# Allegro board senior design v4.brd
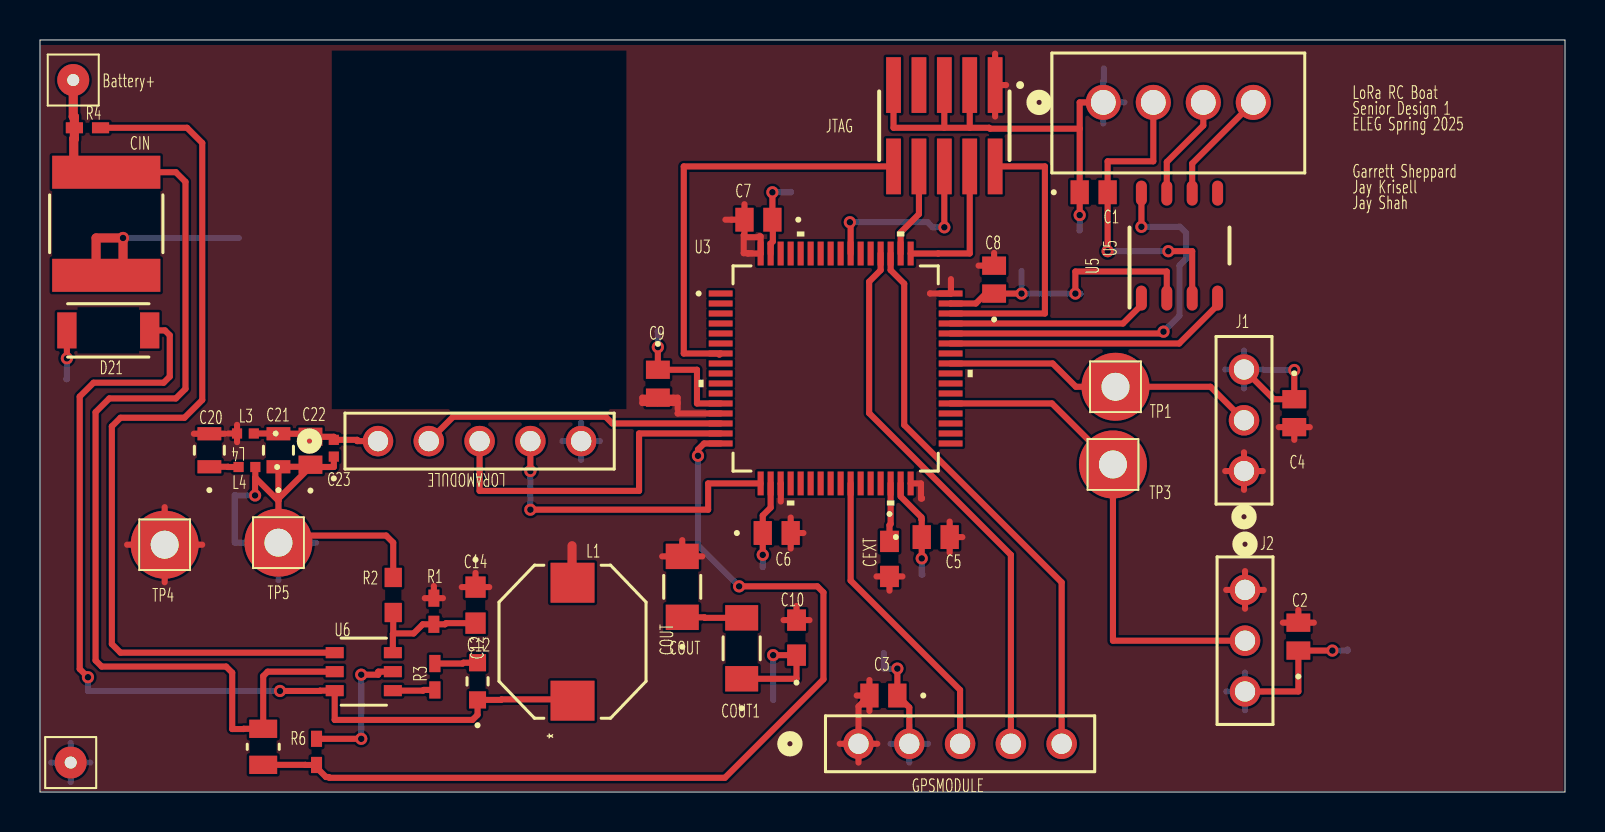
[diagram p0: board, top side]
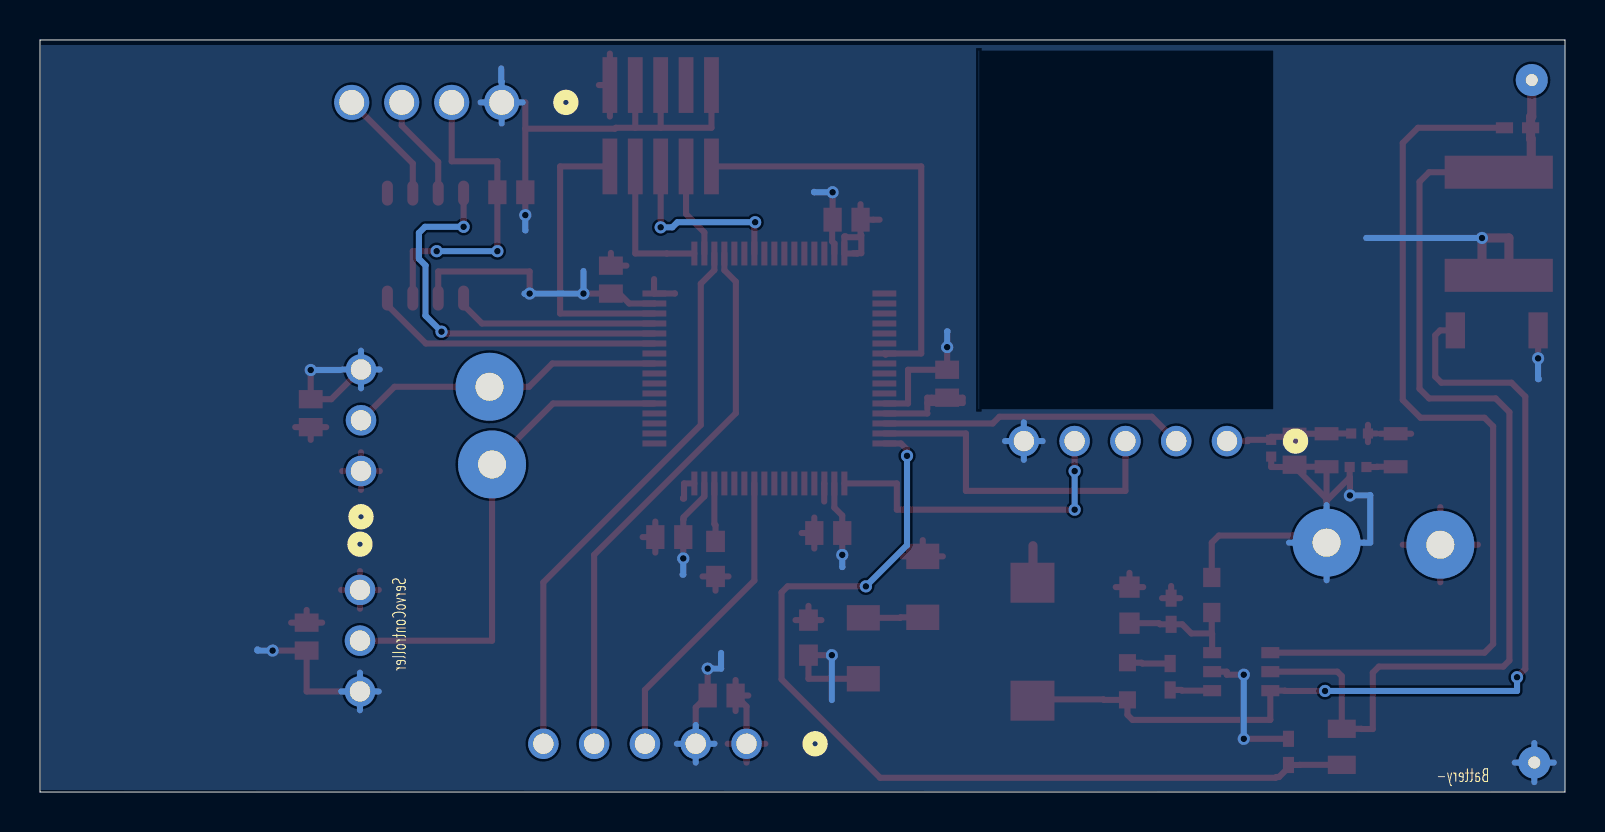
[diagram p1: board, bottom side, seen from below]

Outline 76.26 x 37.61 mm; copper layers: TOP, BOTTOM. Coordinates in mm from the lower left corner of the outline.
Outline path: 0,37.61 0,0 76.26,0 76.26,37.61 0,37.61

## Design rules (mm)
constraint set DEFAULT: min track width 0.305

## Placement (name value [footprint] x y rotation side)
C1  .1uF  [CAP_KGM21_KAV-L]  52.69 30 0 top
C2  .1uF  [CAP_KGM21_KAV-L]  62.93 7.77 90 top
C3  .1uF  [CAP_KGM21_KAV-L]  42.18 4.83 180 top
C4  .1uF  [CAP_KGM21_KAV-L]  62.72 18.95 270 top
C5  .1uF  [CAP_KGM21_KAV-L]  44.79 12.75 0 top
C6  .1uF  [CAP_KGM21_KAV-L]  36.84 12.95 0 top
C7  .1uF  [CAP_KGM21_KAV-L]  35.93 28.63 180 top
C8  .1uF  [CAP_KGM21_KAV-L]  47.71 25.63 90 top
C9  .1uF  [CAP_KGM21_KAV-L]  30.9 20.42 270 top
C10  4.7uF  [CAP_0603_CL10A_1P6XP8_SAM-M]  37.83 7.72 90 top
C12  .1uf  [CAP_CL10_SAM-M]  21.88 5.54 90 top
C14  470pF  [CAP_0603G_AVX-M]  21.78 9.35 270 top
C20  10uF  [G-21_MUR-L]  8.47 17.09 90 top
C21  10uF  [G-21_MUR-L]  11.92 17.09 90 top
C22  .1uF  [CAP_KGM21_KAV-L]  13.52 17.07 90 top
C23  47pF  [CAP_GJM1555C1H220JB01__MUR-L]  14.69 17.2 90 top
CANHEADER  CONN_B4B-XH-A  [CONN_B4B-XH-A_JST]  53.17 34.49 180 top
CEXT  4.7 uF  [CAP_0603_CL10A_1P6XP8_SAM-M]  42.48 11.66 270 top
CIN  10uF  [CAP_NTS_55_2P8T_NIP]  3.31 28.42 90 top
COUT  10uf  [G-31_MUR-M]  32.12 10.26 90 top
COUT1  10uf  [G-31_MUR-M]  35.09 7.19 90 top
D21  DIODE_MFLAT  [M-FLAT_TOS-L]  3.42 23.09 0 top
GND  Battery-  [AMV_CON1]  1.54 1.47 0 top
GPSMODULE  CONN5_1LFBN-RC  [CONN5_1LFBN-RC_SUL]  40.93 2.41 0 top
JTAG  FTSH-105-XX-X-DV  [SAMTEC_FTSH-105-XX-X-DV]  45.22 33.32 180 top
L3  INDUCTOR  [IND_BLM15_0402_MUR-L]  10.27 17.93 180 top
L4  INDUCTOR  [IND_BLM15_0402_MUR-L]  10.35 16.26 180 top
LORAMODULE  CONN5_1LFBN-RC  [CONN5_1LFBN-RC_SUL]  16.9 17.55 0 top
R1  15K  [RC0402N_PAN-M]  19.7 9.04 270 top
R2  4.7K  [RC0603N_YAG-M]  17.66 9.86 90 top
R3  51  [RC0402N_YAG-M]  19.75 5.77 270 top
R4  5.1K  [RC0402N_PAN-M]  2.37 33.22 0 top
R5  30K  [RES_R0805_ROM-M]  11.16 2.26 270 top
R6  10K  [RES_1005_SAM-M]  13.83 2.01 270 top
REF  -  [unnamed]  26.63 7.52 90 top
SPEEDCONTROLLER  CONN_PPTC031  [CONN_PPTC031_SUL]  60.21 16.05 270 top
STEERINGSERVO  CONN_PPTC031  [CONN_PPTC031_SUL]  60.26 10.11 90 top
TP1  TEST POINT  [AMV_TEST_POINT]  53.78 20.27 0 top
TP3  TEST POINT  [AMV_TEST_POINT]  53.66 16.38 0 top
TP4  TEST POINT  [AMV_TEST_POINT]  6.23 12.37 0 top
TP5  TEST POINT  [AMV_TEST_POINT]  11.92 12.47 0 top
U3  STM32F4XXR2  [LQFP64-10X10MM]  39.79 21.18 0 top
U5  TCAN1042H-Q1D  [D0008A_L]  56.98 27.33 90 top
U6  R1240N001x  [SOT-23-6W_PE-SOT23-6W-0512_NMD]  16.19 6.02 0 top
VIN  Battery+  [AMV_CON1]  1.66 35.61 0 top

## Library data of the parts
C1-C10 C14 C20-C23 CEXT COUT COUT1 = C: User Part Number: PN; Tolerance: TOL
C12 = C
CANHEADER = B4B-XH-A: User Part Number: PN; Tolerance: TOL
CIN = KTS500B106M55N0T00: User Part Number: PN; Tolerance: TOL
D21 = CMS06TE12L,Q,M: User Part Number: PN; Tolerance: TOL
GND VIN = CON1
GPSMODULE LORAMODULE = PPTC051LFBN-RC: User Part Number: PN; Tolerance: TOL
JTAG = FTSH-105-XX-X-DV
L3 L4 = INDUCTOR: User Part Number: PN; Tolerance: TOL
R1-R6 = R: User Part Number: PN; Tolerance: TOL
REF = -: User Part Number: PN; Tolerance: TOL
SPEEDCONTROLLER STEERINGSERVO = PPTC031LFBN-RC: User Part Number: PN; Tolerance: TOL
TP1 TP3-TP5 = TEST POINT
U3 = STM32F446RET6TR: User Part Number: PN; Tolerance: TOL
U5 = TCAN1042HDRQ1: Tolerance: TOL; User Part Number: PN
U6 = R1240N001B-TR-FE_3: User Part Number: PN; Tolerance: TOL

## Footprints (pads in the part's own frame, mm; a bottom-side part is the same pattern mirrored in y, then rotated)
AMV_CON1
  round 1.6 hole 0.6: 1(0,0)
AMV_TEST_POINT
  round 3.4 hole 1.4: 1(0,0)
CAP_0603_CL10A_1P6XP8_SAM-M
  rect 1.067x0.94 smd: 1(-0.876,0) 2(0.876,0)
CAP_0603G_AVX-M
  rect 1.067x1.016 smd: 1(-0.902,0) 2(0.902,0)
CAP_CL10_SAM-M
  rect 0.859x0.851 smd: 1(-0.929,0) 2(0.929,0)
CAP_GJM1555C1H220JB01__MUR-L
  rect 0.508x0.508 smd: 1(-0.419,0) 2(0.419,0)
CAP_KGM21_KAV-L
  rect 0.914x1.194 smd: 1(-0.699,0) 2(0.699,0)
CAP_NTS_55_2P8T_NIP
  rect 1.651x5.41 smd: 1(-2.578,0) 2(2.578,0)
CONN5_1LFBN-RC_SUL
  round 1.524 hole 1.016: 1(0,0) 2(2.54,0) 3(5.08,0) 4(7.62,0) 5(10.16,0)
CONN_B4B-XH-A_JST
  round 1.753 hole 1.245: 1(0,0) 2(-2.5,0) 3(-5,0) 4(-7.5,0)
CONN_PPTC031_SUL
  round 1.524 hole 1.016: 1(0,0) 2(-2.54,0) 3(-5.08,0)
D0008A_L
  oval 1.25x0.55 smd: 1(-2.625,1.905) 2(-2.625,0.635) 3(-2.625,-0.635) 4(-2.625,-1.905) 5(2.625,-1.905) 6(2.625,-0.635) 7(2.625,0.635) 8(2.625,1.905)
G-21_MUR-L
  rect 0.66x1.194 smd: 1(-0.826,0) 2(0.826,0)
G-31_MUR-M
  rect 1.27x1.651 smd: 1(-1.524,0) 2(1.524,0)
IND_BLM15_0402_MUR-L
  rect 0.508x0.508 smd: 1(-0.419,0) 2(0.419,0)
LQFP64-10X10MM
  rect 1.194x0.305 smd: 1(-5.75,3.75) 2(-5.75,3.25) 3(-5.75,2.75) 4(-5.75,2.25) 5(-5.75,1.75) 6(-5.75,1.25) 7(-5.75,0.75) 8(-5.75,0.25) 9(-5.75,-0.25) 10(-5.75,-0.75) 11(-5.75,-1.25) 12(-5.75,-1.75) 13(-5.75,-2.25) 14(-5.75,-2.75) 15(-5.75,-3.25) 16(-5.75,-3.75) 33(5.75,-3.75) 34(5.75,-3.25) 35(5.75,-2.75) 36(5.75,-2.25) 37(5.75,-1.75) 38(5.75,-1.25) 39(5.75,-0.75) 40(5.75,-0.25) 41(5.75,0.25) 42(5.75,0.75) 43(5.75,1.25) 44(5.75,1.75) 45(5.75,2.25) 46(5.75,2.75) 47(5.75,3.25) 48(5.75,3.75)
  rect 0.305x1.194 smd: 17(-3.75,-5.75) 18(-3.25,-5.75) 19(-2.75,-5.75) 20(-2.25,-5.75) 21(-1.75,-5.75) 22(-1.25,-5.75) 23(-0.75,-5.75) 24(-0.25,-5.75) 25(0.25,-5.75) 26(0.75,-5.75) 27(1.25,-5.75) 28(1.75,-5.75) 29(2.25,-5.75) 30(2.75,-5.75) 31(3.25,-5.75) 32(3.75,-5.75) 49(3.75,5.75) 50(3.25,5.75) 51(2.75,5.75) 52(2.25,5.75) 53(1.75,5.75) 54(1.25,5.75) 55(0.75,5.75) 56(0.25,5.75) 57(-0.25,5.75) 58(-0.75,5.75) 59(-1.25,5.75) 60(-1.75,5.75) 61(-2.25,5.75) 62(-2.75,5.75) 63(-3.25,5.75) 64(-3.75,5.75)
M-FLAT_TOS-L
  rect 0.965x1.803 smd: 1(-2.07,0) 2(2.07,0)
RC0402N_PAN-M
  rect 0.859x0.551 smd: 1(-0.654,0) 2(0.654,0)
RC0402N_YAG-M
  rect 0.864x0.559 smd: 1(-0.66,0) 2(0.66,0)
RC0603N_YAG-M
  rect 0.965x0.864 smd: 1(-0.876,0) 2(0.876,0)
RES_1005_SAM-M
  rect 0.809x0.551 smd: 1(-0.654,0) 2(0.654,0)
RES_R0805_ROM-M
  rect 0.914x1.397 smd: 1(-0.902,0) 2(0.902,0)
SAMTEC_FTSH-105-XX-X-DV
  rect 0.74x2.79 smd: 01(-2.54,-2.035) 02(-2.54,2.035) 03(-1.27,-2.035) 04(-1.27,2.035) 05(0,-2.035) 06(0,2.035) 07(1.27,-2.035) 08(1.27,2.035) 09(2.54,-2.035) 10(2.54,2.035)
SOT-23-6W_PE-SOT23-6W-0512_NMD
  rect 0.902x0.559 smd: 1(-1.454,0.95) 2(-1.454,0) 3(-1.454,-0.95) 4(1.454,-0.95) 5(1.454,0) 6(1.454,0.95)
unnamed
  rect 2x2.2 smd: (-2.95,0) (2.95,0)

## Nets
3.3V: C2.2 C3.2 C4.2 C5.2 C6.2 C7.2 C8.2 C9.2 C10.2 C14.1 C20.2 CEXT.2 COUT.2 GPSMODULE.1 JTAG.01 L3.2 R1.1 SPEEDCONTROLLER.1 STEERINGSERVO.1 TP4.1 U3.13 U3.19 U3.32 U3.48 U3.64
GND: CIN.1
VBAT: U3.1
0: C1.1 C2.1 C3.1 C4.1 C5.1 C6.1 C7.1 C8.1 C9.1 C10.1 C21.1 C22.1 C23.1 CANHEADER.1 COUT1.1 D21.1 GND.1 GPSMODULE.2 JTAG.03 JTAG.05 JTAG.09 L4.1 LORAMODULE.5 R2.2 R6.1 SPEEDCONTROLLER.3 STEERINGSERVO.3 TP5.1 U3.12 U3.18 U3.31 U3.47 U3.63 U5.2 U6.5
ADC: R5.2 R6.2 U3.16
PA13 TMS: JTAG.02 U3.46
PA14 TCLK: JTAG.04 U3.49
PA15 TDI: JTAG.08 U3.50
PB3 TBO: JTAG.06 U3.55
RESET: JTAG.10 U3.7
N04277: GPSMODULE.3 U3.26
N04281: GPSMODULE.4 U3.52
N04285: GPSMODULE.5 U3.51
N04355: SPEEDCONTROLLER.2 TP1.1 U3.41
N04395: STEERINGSERVO.2 TP3.1 U3.37
N04429: C21.2 C22.2 C23.2 L3.1 LORAMODULE.1
N04477: LORAMODULE.2 U3.14
N04485: LORAMODULE.3 U3.15
N04755: U3.44 U5.8
N04759: U3.43 U5.4
N04763: U3.45 U5.1
N04855: CANHEADER.4 U5.6
N17576: C14.2 R1.2 R2.1 U6.6
N17942: R3.2 U6.4
N18028: C12.1 D21.2 U6.3
N24517: LORAMODULE.4 U3.17
N24691: CANHEADER.3 U5.7
N24886: C1.2 CANHEADER.2 U5.3(VCC)
N27410: C20.1 L4.2
N27791: CEXT.1 U3.30
N061071: C12.2 R3.1
N068040: COUT.1 COUT1.2
N088060: CIN.2 R4.1 R5.1 U6.2(VIN) VIN.1
N148600: R4.2 U6.1

Pads without a net: JTAG 07; U3 2 3 4 5 6 8 9 10 11 20 21 22 23 24 25 27 28 29 33 34 35 36 38 39 40 42 53 54 56 57 58 59 60 61 62; U5 5

## Via types
v1: diameter 0.61, hole 0.33, TOP to BOTTOM, 28 vias

## Routing (per net, layer and track width the routed paths; a pad name or vN(x,y) marks a point on that pad's centre or on a via; arc(x,y) is an arc through that point)
3.3V: length 69.1
  TOP w0.305: C7.2 34.28,28.63 ; C7.2 35.23,29.4 ; C7.2 35.23,27.85 35.19,27.85 35.19,26.95 35.39,26.95 ; C10.2 37.83,9.31 ; C10.2 37.18,8.6 ; C10.2 38.48,8.6 ; 31.89,19.46 31.89,19.72 C9.2 ; 31.89,19.46 30.9,19.46 ; 31.89,19.46 31.89,19.15 ; U3.19 37.04,15.43 37.04,14.53 ; C20.2 9.25,17.92 ; C20.2 7.69,17.92 ; C20.2 8.47,17.93 ; STEERINGSERVO.1 61.2,10.11 ; STEERINGSERVO.1 60.26,9.17 ; STEERINGSERVO.1 60.26,11.05 ; STEERINGSERVO.1 59.32,10.11 ; C2.2 62.93,9.11 ; C2.2 63.7,8.47 ; C2.2 62.15,8.47 ; COUT.2 32.12,12.6 ; COUT.2 33.12,11.79 ; COUT.2 31.11,11.79 ; C9.2 30.9,19.46 ; C9.2 30.12,19.72 30.12,19.46 30.9,19.46 ; JTAG.01 48.31,35.36 ; JTAG.01 47.76,36.93 ; JTAG.01 47.76,33.79 ; 40.93,1.47 GPSMODULE.1 ; GPSMODULE.1 40.93,4.28 C3.2 ; GPSMODULE.1 39.99,2.41 ; GPSMODULE.1 41.87,2.41 ; 60.21,15.11 SPEEDCONTROLLER.1 ; SPEEDCONTROLLER.1 59.27,16.05 ; SPEEDCONTROLLER.1 61.15,16.05 ; SPEEDCONTROLLER.1 60.21,16.99 ; C3.2 41.48,5.6 ; C3.2 40.84,4.83 ; C3.2 41.48,4.05 ; 19.24,9.7 R1.1 ; R1.1 19.7,10.3 ; R1.1 20.15,9.7 ; 44.51,24.94 44.51,24.93 U3.48 45.55,24.93 45.55,25.65 ; 42.48,10.07 CEXT.2 ; CEXT.2 43.13,10.78 ; CEXT.2 41.83,10.78 ; C4.2 63.5,18.25 ; C4.2 62.72,17.61 ; C4.2 61.95,18.25 ; U3.13 31.89,18.93 31.89,18.95 ; C8.2 47.71,26.96 ; C8.2 46.94,26.33 ; C8.2 47.85,26.33 ; C6.2 38.18,12.95 ; C6.2 37.54,13.73 ; C6.2 37.54,12.18 ; 45.49,11.98 C5.2 ; C5.2 45.62,12.62 ; C5.2 45.49,13.53 ; C5.2 46.13,12.75 ; 9.42,17.93 L3.2 ; L3.2 9.85,18.36 ; L3.2 9.85,17.5 ; 21.09,10.25 C14.1 ; C14.1 21.78,10.96 ; C14.1 22.47,10.25 ; 4.36,12.37 TP4.1 ; TP4.1 6.23,14.25 ; TP4.1 8.11,12.37 ; TP4.1 6.23,10.49 ; 35.39,26.95 35.39,26.93 U3.64 36.04,27.79 35.97,27.79 35.97,27.75 35.23,27.75 ; 35.39,26.95 35.6,26.95 ; 26.61,12.32 26.63,12.32 ; 44.11,14.71 44.11,14.68 44.06,14.68 44.06,15.43 U3.32
  TOP w0.457: 26.61,10.46 26.61,12.32
0: length 160.7
  TOP w0.305: R2.2 17.66,12.47 17.31,12.83 12.28,12.83 TP5.1 ; SPEEDCONTROLLER.3 61.7,19.65 C4.1 v1(62.72,21.11) ; R6.1 v1(16.06,2.66) ; D21.1 v1(1.35,21.69) ; 51.99,33.18 51.99,34.49 CANHEADER.1 ; 51.99,33.18 47.51,33.18 47.46,33.22 46.49,33.22 ; 51.99,33.18 C1.1 v1(51.99,28.85) ; COUT1.1 37.83,5.66 C10.1 v1(36.66,6.85) ; GPSMODULE.2 43.47,4.23 C3.1 v1(42.87,6.17) ; U3.12 32.85,19.43 32.85,21.12 C9.1 v1(30.9,22.25) ; U3.47 46.8,24.43 47.29,24.93 C8.1 v1(49.08,24.93) ; v1(10.76,14.83) 10.76,15.72 10.77,15.72 ; 10.77,15.72 11.92,14.57 ; 10.77,15.72 L4.1 ; 11.92,14.57 11.92,14.67 ; 11.92,14.57 TP5.1 ; U5.2 56.35,26.03 51.78,26.03 v1(51.78,24.93) ; 45.22,33.22 42.68,33.22 JTAG.09 ; 45.22,33.22 JTAG.05 ; 45.22,33.22 46.49,33.22 ; 11.92,14.67 13.52,16.27 ; 11.92,14.67 C21.1 13.52,16.27 ; 13.52,16.27 C22.1 13.64,16.26 14.69,16.26 C23.1 ; TP5.1 11.9,12.45 ; v1(36.14,11.86) C6.1 36.14,13.83 36.54,14.23 U3.18 ; STEERINGSERVO.3 62.93,5.03 C2.1 v1(64.63,7.07) ; JTAG.03 46.49,33.22 ; v1(44.09,11.68) C5.1 44.09,13.63 44.08,13.64 44.08,13.74 43.04,14.78 U3.31 ; v1(36.63,30) C7.1 36.65,28.6 36.65,27.53 36.54,27.43 U3.63 ; U6.5 16.92,6.02 16.92,5.87 v1(16.06,5.87)
  TOP w0.457: 2.81,25.73 2.81,27.71 v1(4.15,27.71) 4.15,25.78
  BOTTOM w0.305: 11.92,10.59 TP5.1 ; TP5.1 11.92,14.35 ; TP5.1 13.8,12.47 ; TP5.1 9.74,12.47 9.74,14.83 ; CANHEADER.1 53.17,35.55 53.2,35.55 53.2,36.2 ; CANHEADER.1 52.12,34.49 ; CANHEADER.1 53.17,33.44 ; CANHEADER.1 54.23,34.49 ; 30.87,23.04 30.9,23.04 v1(30.9,22.25) ; 9.74,14.83 v1(10.76,14.83) ; 9.74,14.83 9.74,14.86 ; 42.53,2.41 GPSMODULE.2 ; GPSMODULE.2 43.47,1.47 ; GPSMODULE.2 44.41,2.41 ; GPSMODULE.2 43.47,3.35 ; 52.03,24.92 52.03,24.93 v1(51.78,24.93) v1(49.08,24.93) 49.08,26.06 ; 1.31,20.65 1.35,20.65 v1(1.35,21.69) ; 51.98,28.09 51.99,28.09 v1(51.99,28.85) ; 26.12,17.55 LORAMODULE.5 ; LORAMODULE.5 27.06,18.49 ; LORAMODULE.5 28,17.55 ; LORAMODULE.5 27.06,16.61 ; v1(36.66,6.85) 36.66,4.6 ; v1(62.72,21.11) 61.25,21.11 ; STEERINGSERVO.3 61.2,5.03 ; STEERINGSERVO.3 60.26,5.97 ; STEERINGSERVO.3 60.26,4.09 ; STEERINGSERVO.3 59.32,5.03 ; v1(44.09,11.68) 44.09,10.87 44.13,10.87 ; v1(36.14,11.86) 36.14,11.25 36.13,11.25 ; v1(42.87,6.17) 42.2,6.17 42.2,6.96 ; v1(16.06,2.66) v1(16.06,5.87) ; 37.55,30.02 37.55,30 v1(36.63,30) ; 65.39,7.14 65.39,7.07 v1(64.63,7.07) ; SPEEDCONTROLLER.3 61.15,21.13 ; SPEEDCONTROLLER.3 59.27,21.13 ; SPEEDCONTROLLER.3 60.21,20.19 ; SPEEDCONTROLLER.3 60.21,22.07 ; v1(4.15,27.71) 9.94,27.71 ; GND.1 2.51,1.47 ; GND.1 1.54,0.49 ; GND.1 1.54,2.45 ; GND.1 0.56,1.47
ADC: length 48
  TOP w0.305: v1(32.9,16.81) 32.9,17.13 33.21,17.43 U3.16 ; R5.2 13.27,1.36 13.27,1.35 R6.2 13.83,1.22 14.3,0.75 14.43,0.75 14.47,0.71 34.25,0.71 39.18,5.64 39.18,9.98 38.87,10.29 v1(34.96,10.29)
  BOTTOM w0.305: v1(32.9,16.81) 32.9,12.34 v1(34.96,10.29)
PA13 TMS: length 14.6
  TOP w0.305: JTAG.02 50.25,31.29 50.25,23.93 U3.46
PA14 TCLK: length 7.3
  TOP w0.305: U3.49 44.92,26.93 44.92,26.94 46.49,26.94 JTAG.04
PA15 TDI: length 4.7
  TOP w0.305: U3.50 43.04,27.99 43.95,28.91 JTAG.08
PB3 TBO: length 9.5
  TOP w0.305: U3.55 40.54,28.5 v1(40.5,28.5) ; v1(45.22,28.24) JTAG.06
  BOTTOM w0.305: v1(40.5,28.5) 44.39,28.5 44.64,28.24 v1(45.22,28.24)
RESET: length 21.8
  TOP w0.305: 33.97,21.87 U3.7 32.19,21.93 32.19,31.29 JTAG.10
N04277: length 15.3
  TOP w0.305: U3.26 40.54,10.58 46.01,5.11 GPSMODULE.3
N04281: length 27.7
  TOP w0.305: U3.52 42.04,26.1 41.46,25.53 41.46,18.95 48.55,11.86 GPSMODULE.4
N04285: length 28.1
  TOP w0.305: U3.51 42.54,26.1 43.22,25.43 43.22,18.36 51.09,10.48 GPSMODULE.5
N04355: length 15.8
  TOP w0.305: U3.41 50.64,21.43 51.8,20.27 TP1.1 58.53,20.27 SPEEDCONTROLLER.2
N04395: length 24.8
  TOP w0.305: STEERINGSERVO.2 53.66,7.57 TP3.1 50.61,19.43 U3.37
N04429: length 6.6
  TOP w0.305: LORAMODULE.1 15.86,17.55 15.86,17.61 C23.2 14.69,17.77 C22.2 13.52,17.92 C21.2 11.92,17.93 L3.1
N04477: length 15.2
  TOP w0.305: U3.14 28.62,18.43 28.28,18.77 20.66,18.77 LORAMODULE.2
N04485: length 17.4
  TOP w0.305: LORAMODULE.3 21.98,15.06 29.96,15.06 29.96,17.93 U3.15
N04755: length 20.1
  TOP w0.305: v1(56.18,23.03) 56.09,22.93 U3.44 ; U5.8 v1(55.08,28.27)
  BOTTOM w0.305: v1(56.18,23.03) 56.98,23.83 56.98,26.34 57.31,26.67 57.31,27.97 57.01,28.27 v1(55.08,28.27)
N04759: length 14.5
  TOP w0.305: U5.4 58.89,24.36 56.97,22.43 U3.43
N04763: length 10.3
  TOP w0.305: U5.1 55.08,24.36 54.16,23.43 U3.45
N04855: length 5.8
  TOP w0.305: U5.6 57.62,31.44 CANHEADER.4
N17576: length 6.3
  TOP w0.305: 17.66,7.93 18.69,7.93 19.14,8.39 R1.2 20.25,8.39 20.31,8.45 C14.2 ; 17.66,7.93 R2.1 ; 17.66,7.93 17.65,7.91 U6.6
N17942: length 2.1
  TOP w0.305: R3.2 19.19,5.11 19.15,5.07 U6.4
N18028: length 49.8
  TOP w0.305: U6.3 14.01,5.07 14.01,5.05 v1(12,5.05) ; U6.3 14.75,5.05 ; U6.3 14.74,3.61 14.74,3.61 21.63,3.61 21.88,3.86 C12.1 23.06,4.61 23.08,4.63 26.83,4.63 ; v1(2.4,5.74) 1.99,6.15 1.99,19.78 2.68,20.47 6.18,20.47 6.49,20.78 6.49,22.85 6.25,23.09 D21.2
  BOTTOM w0.305: v1(2.4,5.74) 2.4,5.05 v1(12,5.05)
N24517: length 16.3
  TOP w0.305: v1(24.52,14.12) 33.41,14.12 33.41,15.43 U3.17 ; LORAMODULE.4 v1(24.52,16.05)
  BOTTOM w0.305: v1(24.52,16.05) v1(24.52,14.12)
N24691: length 5.3
  TOP w0.305: U5.7 56.35,31.51 58.17,33.34 CANHEADER.3
N24886: length 16.3
  TOP w0.305: v1(56.43,27.05) 57.62,27.05 U5.3 ; v1(53.39,27.05) C1.2 53.39,31.55 55.67,31.55 CANHEADER.2
  BOTTOM w0.305: v1(53.39,27.05) v1(56.43,27.05)
N27410: length 1.5
  TOP w0.305: L4.2 9.4,16.26 9.4,16.27 C20.1
N27791: length 2.9
  TOP w0.305: U3.30 42.54,13.41 42.48,13.35 CEXT.1
N061071: length 2.2
  TOP w0.305: R3.1 21.14,6.43 21.18,6.47 C12.2
N068040: length 3
  TOP w0.305: COUT.1 33.22,8.74 33.25,8.71 COUT1.2
N088060: length 56
  TOP w0.305: CIN.2 6.79,31 7.28,30.52 7.28,20.17 6.79,19.68 3.47,19.68 2.78,19 2.78,6.58 3.09,6.27 9.31,6.27 9.61,5.97 9.61,3.15 10.18,3.15 10.18,3.16 R5.1 11.16,5.8 11.38,6.02 U6.2
  TOP w0.457: VIN.1 1.66,33.78 1.72,33.78 R4.1 1.72,32.67 1.69,32.67 1.69,31 CIN.2
N148600: length 45.5
  TOP w0.305: R4.2 7.35,33.22 8.11,32.46 8.11,19.61 7.23,18.72 4.02,18.72 3.59,18.29 3.59,7.4 4.02,6.97 U6.1

## Copper pours and planes (outline as drawn; the poured copper is in the pictures)
3.3V on TOP: 76.19,0.05 0.01,0.05 0.01,37.36 76.19,37.36 ; 1 cut-out
0 on BOTTOM: 0.01,37.36 76.21,37.36 76.21,0.1 0.01,0.03 ; 1 cut-out

Small or netless copper shapes (teardrops, artwork), in the pictures only: 1 on BOTTOM

## Text on the board
Ref Des/Silkscreen Bottom: Battery- | ServoController
Ref Des/Silkscreen Top: Battery+ | CIN | J1 | J2 | LoRa RC Boat | Senior Design 1 | ELEG Spring 2025 | Garrett Sheppard | Jay Krisell | Jay Shah
DEVICE_TYPE_TOP: Battery+
